# EAGLE board uMouse_prototype (EAGLE 8.5.0)
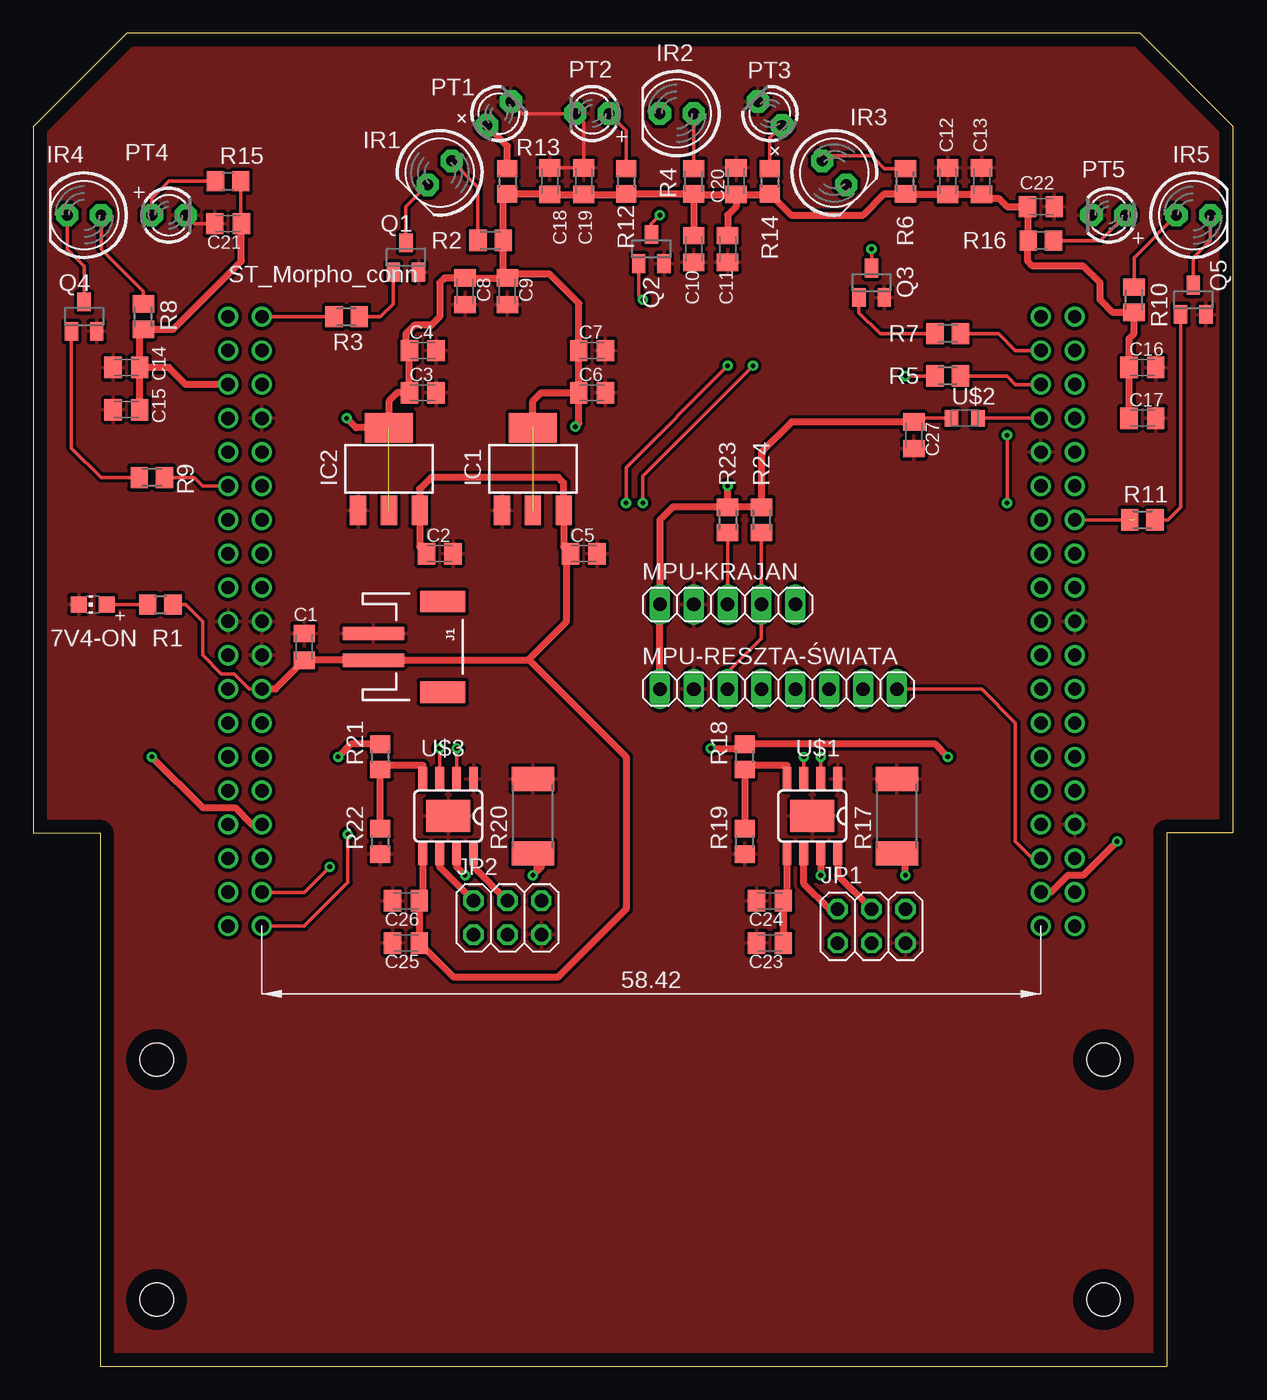
[diagram p0: board, top side]
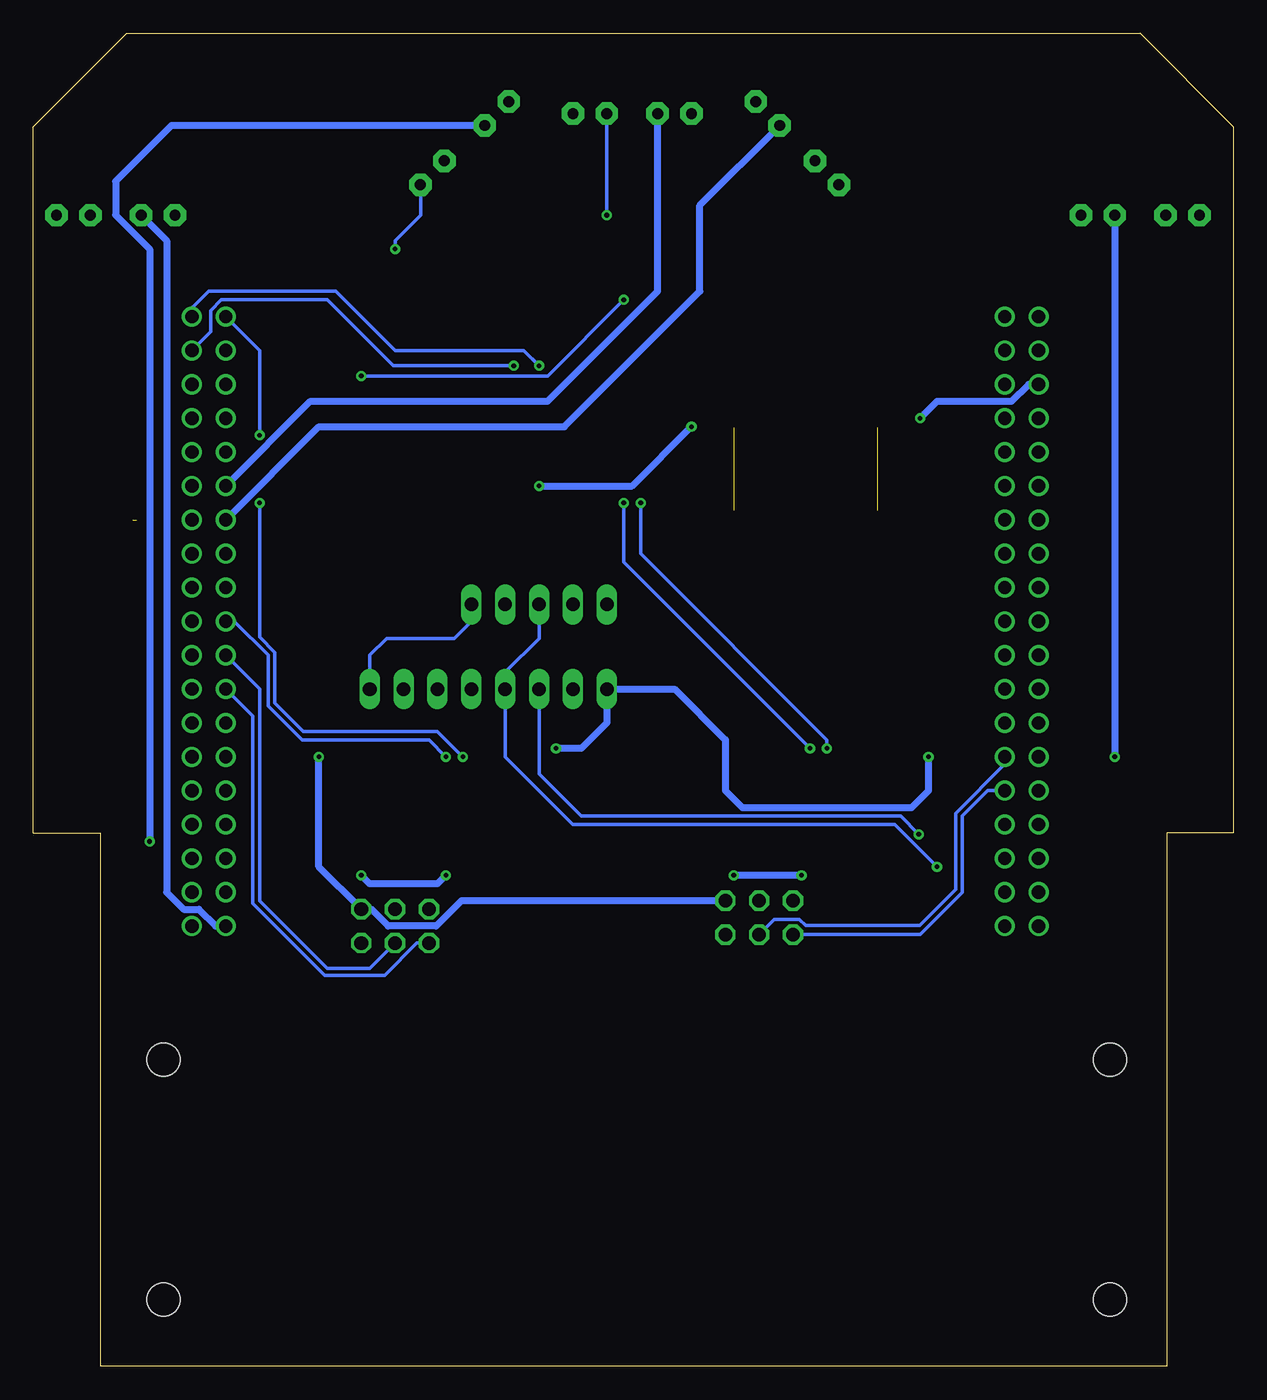
[diagram p1: board, bottom side, seen from below]

Size 90 x 100 mm. Coordinates in mm from the lower left corner, seen from the top.
Outline: 5,0 85,0 85,40 90,40 90,93 83,100 7,100 0,93 0,40 5,40 5,0
Copper layers (1*16): Top 0.035mm / dielectric 1.5mm / Bottom 0.035mm
Design rules "default *": minimum track width 5mil, minimum drill 0.15mm, track to track 6mil, track to pad 6mil, pad to pad 6mil, via to via 6mil, smd to smd 6mil, copper to edge 40mil, drill to drill 6mil, minimum pad ring 10mil, minimum via ring 8mil, stop-mask expansion 4mil, vias tented up to drill 0mil, thermal gap 10mil
Net classes: 0 default: width 0.305 mm, drill 0.508 mm, clearance 0.254 mm
Holes 2.5 mm at 9.25,5 9.25,23 80.25,23 80.25,5

## Footprints (pad centres in the part's own frame; a part is rotated, then mirrored left to right if it is on the bottom)
CHIP-LED0805 = smd 1.2 x 1.2: A 0,-1.05; C 0,1.05
C0805K = smd 1.3 x 1.6: 1 -1,0; 2 1,0
SOT223 = smd 1.219 x 2.235: 1 -2.311,-3.099; 2 0,-3.099; 3 2.311,-3.099 | smd 3.6 x 2.2: TAB 0,3.099
LED5MM = drill 0.813 pad 1.676 octagon: A -1.27,0; K 1.27,0
JST-2-SMD = smd 1 x 4.6: 1 -1,-3.7; 2 1,-3.7 | smd 1.6 x 3.4: NC1 -3.4,1.5; NC2 3.4,1.5
2X03 = drill 1.016 octagon: 1 -2.54,-1.27; 2 -2.54,1.27; 3 0,-1.27; 4 0,1.27; 5 2.54,-1.27; 6 2.54,1.27
1X05 = drill 1.016 long: 1 -5.08,0; 2 -2.54,0; 3 0,0; 4 2.54,0; 5 5.08,0
1X08 = drill 1.016 long: 1 -8.89,0; 2 -6.35,0; 3 -3.81,0; 4 -1.27,0; 5 1.27,0; 6 3.81,0; 7 6.35,0; 8 8.89,0
LED3MM = drill 0.813 pad 1.676 octagon: A -1.27,0; K 1.27,0
SOT23 = smd 1 x 1.4: 1 -0.95,-1.1; 2 0.95,-1.1; 3 0,1.1
R0805 = smd 1.3 x 1.5: 1 -0.95,0; 2 0.95,0
M0805 = smd 1.3 x 1.6: 1 -0.95,0; 2 0.95,0
R2512 = smd 1.8 x 3.2: 1 -2.8,0; 2 2.8,0
SOIC8TP = smd 1.75 x 0.65: 1 -2.8,1.905; 2 -2.8,0.635; 3 -2.8,-0.635; 4 -2.8,-1.905; 5 2.8,-1.905; 6 2.8,-0.635; 7 2.8,0.635; 8 2.8,1.905 | smd 2.41 x 3.3: PAD 0,0
RESC0805_L = smd 1 x 1.25: 1 -1,0; 2 1,0
MORPHO-4X19 = drill 1: 3V3_0 -27.94,25.4; 3V3_1 -27.94,30.48; 5V0_0 -27.94,22.86; 5V0_1 -27.94,38.1; AGND 33.02,5.08; AVDD 30.48,35.56; BOOT0 -30.48,35.56; GND_0 -30.48,20.32; GND_1 -27.94,17.78; GND_2 -27.94,20.32; GND_3 -27.94,35.56; GND_4 30.48,33.02; GND_5 33.02,20.32; NC_0 -27.94,12.7; NC_1 -27.94,33.02; PA0 -27.94,10.16; PA1 -27.94,7.62; PA2 30.48,0; PA3 30.48,-2.54; PA4 -27.94,5.08; PA5 30.48,30.48; PA6 30.48,27.94; PA7 30.48,25.4; PA8 30.48,15.24; PA9 30.48,17.78; PA10 30.48,2.54; PA11 33.02,27.94; PA12 33.02,30.48; PA13 -30.48,27.94; PA14 -30.48,25.4; PA15 -30.48,22.86; PB0 -27.94,2.54; PB1 33.02,15.24; PB2 33.02,17.78; PB3 30.48,5.08; PB4 30.48,10.16; PB5 30.48,7.62; PB6 30.48,22.86; PB7 -30.48,17.78; PB8 30.48,40.64; PB9 30.48,38.1; PB10 30.48,12.7; PB11 33.02,22.86; PB12 33.02,25.4; PB13 33.02,7.62; PB14 33.02,10.16; PB15 33.02,12.7; PC0 -27.94,-2.54; PC1 -27.94,0; PC2 -30.48,0; PC3 -30.48,-2.54; PC4 33.02,2.54; PC5 33.02,38.1; PC6 33.02,40.64; PC7 30.48,20.32; PC8 33.02,43.18; PC9 30.48,43.18; PC10 -30.48,43.18; PC11 -27.94,43.18; PC12 -30.48,40.64; PC13 -30.48,15.24; PC14 -30.48,12.7; PC15 -30.48,10.16; PD2 -27.94,40.64; PD8 33.02,33.02; PF0 -30.48,7.62; PF1 -30.48,5.08; PF4 33.02,-2.54; PF5 33.02,0; PF6 -30.48,33.02; PF7 -30.48,30.48; USB_5V 33.02,35.56; VBAT -30.48,2.54; VDD -30.48,38.1; VIN -27.94,15.24; ~RST -27.94,27.94

## Placement (x,y rotation side)
7V4-ON  [CHIP-LED0805]  4.45,57.15 90 top
C1  4.7uF 16V  [C0805K]  20.32,53.98 90 top
C2  1uF 16V  [C0805K]  30.48,60.96 0 top
C3  4.7uF 6.3V  [C0805K]  29.21,73.03 0 top
C4  100nF 6.3V  [C0805K]  29.21,76.2 0 top
C5  1uF 16V  [C0805K]  41.27,60.96 0 top
C6  4.7uF 6.3V  [C0805K]  41.91,73.03 0 top
C7  100nF 6.3V  [C0805K]  41.91,76.2 0 top
C8  100nF 6.3V  [C0805K]  32.38,80.64 270 top
C9  1uF 6.3V  [C0805K]  35.56,80.64 270 top
C10  100nF 6.3V  [C0805K]  49.53,83.82 270 top
C11  1uF 6.3V  [C0805K]  52.07,83.82 270 top
C12  100nF 6.3V  [C0805K]  68.58,88.9 90 top
C13  1uF 6.3V  [C0805K]  71.12,88.9 90 top
C14  100nF 6.3V  [C0805K]  6.99,74.93 180 top
C15  1uF 6.3V  [C0805K]  6.99,71.75 180 top
C16  100nF 6.3V  [C0805K]  83.19,74.93 0 top
C17  1uF 6.3V  [C0805K]  83.19,71.12 0 top
C18  1uF 6.3V  [C0805K]  38.73,88.9 90 top
C19  1uF 6.3V  [C0805K]  41.27,88.9 90 top
C20  1uF 6.3V  [C0805K]  52.7,88.9 90 top
C21  1uF 6.3V  [C0805K]  14.61,85.72 180 top
C22  1uF 6.3V  [C0805K]  75.56,87 0 top
C23  4.7uF  [C0805K]  55.24,31.75 180 top
C24  100nF  [C0805K]  55.24,34.92 180 top
C25  4.7uF  [C0805K]  27.94,31.75 180 top
C26  100nF  [C0805K]  27.94,34.92 180 top
C27  100nF 6.3V  [C0805K]  66.04,69.85 270 top
IC1  LM1117IMPX-5.0  [SOT223]  37.47,67.31 0 top
IC2  LM1117IMPX-5.0  [SOT223]  26.67,67.31 0 top
IR1  5mm IR  [LED5MM]  30.48,89.53 225 top
IR2  5mm IR  [LED5MM]  48.26,93.98 180 top
IR3  5mm IR  [LED5MM]  60.07,89.53 315 top
IR4  5mm IR  [LED5MM]  3.81,86.36 180 top
IR5  5mm IR  [LED5MM]  87,86.36 0 top
J1  [JST-2-SMD]  29.21,53.98 270 top
JP1  [2X03]  62.87,33.02 0 top
JP2  [2X03]  35.56,33.66 0 top
MPU-KRAJAN  [1X05]  52.07,57.15 0 top
MPU-RESZTA-ŚWIATA  [1X08]  55.88,50.8 0 top
PT1  [LED3MM]  34.92,93.98 45 top
PT2  [LED3MM]  41.91,93.98 180 top
PT3  [LED3MM]  55.24,93.98 135 top
PT4  [LED3MM]  10.16,86.36 0 top
PT5  [LED3MM]  80.64,86.36 180 top
Q1  [SOT23]  27.94,83.19 0 top
Q2  [SOT23]  46.35,83.82 0 top
Q3  [SOT23]  62.87,81.28 0 top
Q4  [SOT23]  3.81,78.74 0 top
Q5  [SOT23]  87,80.01 0 top
R1  1k  [R0805]  9.53,57.15 0 top
R2  10R  [M0805]  34.29,84.45 0 top
R3  1k  [M0805]  23.5,78.74 180 top
R4  10R  [M0805]  49.53,88.9 270 top
R5  1k  [M0805]  68.58,74.3 0 top
R6  10R  [M0805]  65.41,88.9 270 top
R7  1k  [M0805]  68.58,77.47 0 top
R8  10R  [M0805]  8.26,78.74 270 top
R9  1k  [M0805]  8.89,66.67 0 top
R10  10R  [M0805]  82.55,80.01 270 top
R11  1k  [M0805]  83.19,63.5 180 top
R12  [R0805]  44.45,88.9 270 top
R13  [R0805]  35.56,88.9 270 top
R14  [R0805]  55.24,88.9 270 top
R15  [R0805]  14.61,88.9 0 top
R16  [R0805]  75.56,84.45 180 top
R17  [R2512]  64.77,41.27 90 top
R18  [R0805]  53.34,45.72 90 top
R19  [R0805]  53.34,39.37 90 top
R20  [R2512]  37.47,41.27 90 top
R21  [R0805]  26.04,45.72 90 top
R22  [R0805]  26.04,39.37 90 top
R23  1k  [M0805]  52.07,63.5 90 top
R24  1k  [M0805]  54.61,63.5 90 top
U$1  A4950-TOMEK  [SOIC8TP]  58.42,41.27 270 top
U$2  [RESC0805_L]  69.85,71.12 0 top
U$3  A4950-TOMEK  [SOIC8TP]  31.11,41.27 270 top
U$5  ST_MORPHO_STM32_F446RE  [MORPHO-4X19]  45.09,35.56 0 top

## Library data of the parts
7V4-ON IR1-IR5 PT1-PT5 Q1-Q5 = adafruit
C1-C27 R2-R24 = rcl
IC1 IC2 = lm1117
J1 = SparkFun-Connectors; PROD_ID: CONN-11443; SF_ID: PRT-08612
JP1 JP2 MPU-KRAJAN MPU-RESZTA-ŚWIATA = pinhead
R1 = resistor
U$1 U$3 = allegro_a4950
U$2 = Nordic_nRF
U$5 = st-morpho

## Nets
7.4V/VBAT: C1.1 C2.1 C5.1 C25.1 C26.1 IC1.3 IC2.3 J1.2 R1.2 U$3.5 U$5.VIN
GND: 7V4-ON.C C1.2 C2.2 C3.2 C4.2 C5.2 C6.2 C7.2 C8.2 C9.2 C10.2 C11.2 C12.2 C13.2 C14.2 C15.2 C16.2 C17.2 C18.2 C19.2 C20.2 C21.2 C22.2 C23.2 C24.2 C25.2 C26.2 C27.2 IC1.1 IC2.1 J1.1 JP1.5 JP2.5 MPU-KRAJAN.2 MPU-RESZTA-ŚWIATA.2 PT1.K PT2.K PT3.K PT4.K PT5.K Q1.2 Q2.2 Q3.2 Q4.2 Q5.2 R17.2 R19.1 R20.2 R22.1 U$1.1 U$1.PAD U$3.1 U$3.PAD U$5.AGND U$5.GND_0 U$5.GND_1 U$5.GND_2 U$5.GND_3 U$5.GND_4 U$5.GND_5
INT: MPU-KRAJAN.5 MPU-RESZTA-ŚWIATA.8 U$5.PA10
IR1_SIGNAL: R3.2 U$5.PC11
IR2_SIGNAL: R5.2 U$5.PB9
IR3: IR3.K Q3.3
IR3_SIGNAL: R7.2 U$5.PB8
IR4_SIGNAL: R9.2 U$5.PF7
IR5_SIGNAL: R11.2 U$5.PA11
LEFT-ENC-A: JP2.3 U$5.PA0
LEFT-ENC-B: JP2.1 U$5.PA1
LEFT-M-OUT1: JP2.2 U$3.6
LEFT-M-OUT2: JP2.4 U$3.8
LEFT-M-PWM1: U$3.3 U$5.PC8
LEFT-M-PWM2: U$3.2 U$5.PC6
N$1: 7V4-ON.A R1.1
N$2: Q1.1 R3.1
N$3: IR1.A R2.1
N$4: IR1.K Q1.3
N$5: Q2.1 R5.1
N$6: IR2.A R4.1
N$7: IR2.K Q2.3
N$8: Q3.1 R7.1
N$9: IR3.A R6.1
N$11: Q4.1 R9.1
N$12: IR4.A R8.1
N$13: IR4.K Q4.3
N$14: Q5.1 R11.1
N$15: IR5.A R10.1
N$16: IR5.K Q5.3
N$17: R17.1 U$1.7
N$18: R18.1 R19.2 U$1.4
N$19: R20.1 U$3.7
N$20: R21.1 R22.2 U$3.4
N$22: U$2.2 U$5.AVDD
RECEIVER_1: PT1.A R13.1 U$5.PA6
RECEIVER_2: PT2.A R12.1 U$5.PA5
RECEIVER_3: PT3.A R14.1 U$5.PA2
RECEIVER_4: PT4.A R15.1 U$5.PA4
RECEIVER_5: PT5.A R16.1 U$5.PA3
RIGHT-ENC-A: JP1.3 U$5.PA9
RIGHT-ENC-B: JP1.1 U$5.PA8
RIGHT-M-OUT1: JP1.2 U$1.6
RIGHT-M-OUT2: JP1.4 U$1.8
RIGHT-M-PWM1: U$1.3 U$5.PC9
RIGHT-M-PWM2: U$1.2 U$5.PC7
SCL: MPU-KRAJAN.4 MPU-RESZTA-ŚWIATA.3 R24.1 U$5.PC0
SDA: MPU-KRAJAN.3 MPU-RESZTA-ŚWIATA.4 R23.1 U$5.PC1
VBAT: C23.1 C24.1 U$1.5
VCC: C3.1 C4.1 C6.1 C7.1 C8.1 C9.1 C10.1 C11.1 C12.1 C13.1 C14.1 C15.1 C16.1 C17.1 C18.1 C19.1 C20.1 C21.1 C22.1 C27.1 IC1.2 IC1.TAB IC2.2 IC2.TAB JP1.6 JP2.6 MPU-KRAJAN.1 MPU-RESZTA-ŚWIATA.1 R2.2 R4.2 R6.2 R8.2 R10.2 R12.2 R13.2 R14.2 R15.2 R16.2 R18.2 R21.2 R23.2 R24.2 U$2.1 U$5.VDD

## Tracks (layer width: path | path; a pad name or v marks a point on that pad's centre or on a via)
7.4V/VBAT
  Top 0.254: U$5.VIN 16.21,50.8 15.07,51.94 14.11,51.94 12.7,53.34 12.7,55.88 11.43,57.15 R1.2
  Top 0.508: U$5.VIN 18.14,50.8 C1.1 J1.2 37.1,52.98 37.15,53.02 | 37.15,53.02 40.01,55.88 40.01,60.69 C5.1 39.78,61.46 IC1.3 39.78,66.27 39.37,66.67 29.84,66.67 28.98,65.81 IC2.3 28.98,61.46 C2.1 | U$3.5 29.21,35.2 C26.1 C25.1 31.48,29.21 39.37,29.21 44.45,34.29 44.45,45.72 37.15,53.02
GND
  Top 0.254: C21.2 12.06,85.72 PT4.K | C18.2 C19.2 41.27,93.34 PT2.K 36.72,93.98 PT1.K
  pour Top: 0,93.98 7.62,101.6 82.55,101.6 91.44,92.71 91.44,39.37 86.36,39.37 86.36,-1.27 3.81,-1.27 3.81,39.37 -1.27,39.37 -1.27,92.71
INT
  Top 0.254: MPU-RESZTA-ŚWIATA.8 71.12,50.8 73.66,48.26 73.66,39.37 74.93,38.1 U$5.PA10
  Bottom 0.254: MPU-RESZTA-ŚWIATA.8 64.77,53.34 63.5,54.61 58.42,54.61 57.15,55.88 MPU-KRAJAN.5
IR1_SIGNAL
  Top 0.254: U$5.PC11 R3.2
IR2_SIGNAL
  Top 0.254: U$5.PB9 73.66,73.66 73.03,74.3 R5.2
IR3  (via drill 0.35)
  Top 0.254: Q3.3 v62.87,83.82
  Bottom 0.254: v62.87,83.82 62.87,84.45 60.96,86.36 60.96,88.63 IR3.K | IR3.K | IR3.K
IR3_SIGNAL
  Top 0.254: U$5.PB8 73.66,76.2 72.39,77.47 R7.2
IR4_SIGNAL
  Top 0.254: U$5.PF7 12.7,66.04 12.06,66.67 R9.2
IR5_SIGNAL  (1 unrouted)
  Top 0.254: U$5.PA11 82.55,63.5
LEFT-ENC-A
  Bottom 0.254: JP2.3 34.42,33.53 32.55,33.53 32.08,33.06 23.54,33.06 20.83,35.77 20.83,41.48 17.14,45.17 U$5.PA0
LEFT-ENC-B
  Bottom 0.254: JP2.1 23.5,32.38 20.32,35.56 20.32,41.27 18.41,43.18 U$5.PA1
LEFT-M-OUT1
  Top 0.508: JP2.2 30.48,37.47 U$3.6
LEFT-M-OUT2
  Top 0.508: JP2.4 33.02,37.47 U$3.8
LEFT-M-PWM1  (via drill 0.35)
  Top 0.254: v52.07,75.05 44.45,67.43 v44.45,64.77 | v30.48,46.35 U$3.3
  Bottom 0.254: U$5.PC8 78.11,79.38 76.83,80.64 67.31,80.64 62.87,76.2 53.22,76.2 v52.07,75.05 52.58,75.56 | v44.45,64.77 44.45,60.96 30.48,46.99 v30.48,46.35
LEFT-M-PWM2  (via drill 0.35)
  Top 0.254: U$3.2 v31.75,46.35 | v45.72,64.77 45.72,66.8 v53.98,75.05
  Bottom 0.254: v31.75,46.35 45.72,60.33 v45.72,64.77 | v53.98,75.05 62.99,75.05 67.94,80.01 75.9,80.01 76.7,79.21 76.7,77.61 U$5.PC6
N$1
  Top 0.254: R1.1 7V4-ON.A
N$2
  Top 0.254: Q1.1 26.99,79.69 26.04,78.74 R3.1
N$3
  Top 0.254: IR1.A 33.34,88.47 R2.1
N$4
  Top 0.254: IR1.K 27.94,87 Q1.3
N$5  (via drill 0.35)
  Top 0.254: Q2.1 45.41,80.33 v45.72,80.01 | v65.41,74.3 R5.1
  Bottom 0.254: v45.72,80.01 51.44,74.3 v65.41,74.3
N$6
  Top 0.254: R4.1 IR2.A
N$7  (via drill 0.35)
  Top 0.254: Q2.3 46.35,85.72 v46.99,86.36
  Bottom 0.254: v46.99,86.36 IR2.K
N$8
  Top 0.254: R7.1 63.5,77.47 61.91,79.06 Q3.1
N$9
  Top 0.254: R6.1 63.82,89.85 62.87,90.81 59.55,90.81 IR3.A
N$11
  Top 0.254: R9.1 5.08,66.67 2.86,68.89 Q4.1
N$12
  Top 0.254: R8.1 8.26,80.64 5.08,83.82 IR4.A
N$13
  Top 0.254: IR4.K 2.54,83.82 3.81,82.55 Q4.3
N$14
  Top 0.254: Q5.1 86.05,64.45 85.09,63.5 R11.1
N$15
  Top 0.254: IR5.A 82.55,83.19 R10.1
N$16
  Top 0.254: Q5.3 87,83.19 88.27,84.45 IR5.K
N$17  (via drill 0.35)
  Top 0.508: U$1.7 v59.05,36.83 | v65.41,36.83 65.41,38.73 65.14,38.48 R17.1
  Bottom 0.508: v59.05,36.83 59.69,36.2 64.77,36.2 v65.41,36.83
N$18
  Top 0.508: R19.2 R18.1 53.66,45.09 56.52,45.09 U$1.4
N$19  (via drill 0.35)
  Top 0.508: U$3.7 31.75,37.47 v32.38,36.83 | v37.47,36.83 37.78,37.15 | 37.78,37.15 38.1,37.47 38.1,38.1 | 37.78,37.15 37.78,37.78 38.1,38.1 | R20.1 37.73,38.48 38.1,38.1
  Bottom 0.508: v32.38,36.83 v37.47,36.83
N$20
  Top 0.508: R22.2 R21.1 26.35,45.09 29.21,45.09 U$3.4
N$22
  Top 0.254: U$5.AVDD U$2.2
RECEIVER_1
  Top 0.508: PT1.A 35.56,91.55 R13.1
  Bottom 0.508: U$5.PA6 68.58,70.48 50.16,70.48 40.01,80.64 40.01,87.1 PT1.A
RECEIVER_2
  Top 0.254: R12.1 44.45,92.71 PT2.A
  Bottom 0.508: U$5.PA5 69.22,72.39 51.44,72.39 43.18,80.64 PT2.A
RECEIVER_3  (via drill 0.35)
  Top 0.254: R14.1 55.24,92.18 PT3.A
  Top 0.508: v81.28,39.37 78.73,36.82 77.58,36.82 76.32,35.56 U$5.PA2
  Bottom 0.508: PT3.A 79.64,93.08 83.82,88.9 83.82,86.36 81.28,83.82 v81.28,39.37
RECEIVER_4  (via drill 0.35)
  Top 0.254: PT4.A 8.89,87.63 10.16,88.9 R15.1
  Top 0.508: v8.89,45.72 12.71,41.9 15.13,41.9 16.39,40.64 U$5.PA4
  Bottom 0.508: PT4.A v8.89,45.72
RECEIVER_5
  Top 0.254: PT5.A 80.01,84.45 R16.1
  Bottom 0.508: PT5.A 80.01,84.45 80.01,35.56 78.73,34.28 77.58,34.28 76.32,33.02 U$5.PA3
RIGHT-ENC-A
  Bottom 0.254: U$5.PA9 73.03,50.8 73.03,34.92 67.94,29.84 64.77,29.84 JP1.3
RIGHT-ENC-B
  Bottom 0.254: U$5.PA8 73.53,48.77 73.53,34.72 68.16,29.34 63.66,29.34 61.25,31.75 JP1.1
RIGHT-M-OUT1
  Top 0.508: JP1.2 59.69,34.29 57.78,36.2 U$1.6
RIGHT-M-OUT2
  Top 0.508: JP1.4 60.33,36.83 U$1.8
RIGHT-M-PWM1  (via drill 0.35)
  Top 0.254: U$1.3 v57.78,45.72 | v73.03,64.77 v73.03,69.85
  Bottom 0.254: v57.78,45.72 59.69,47.62 69.77,47.62 71.88,49.74 71.88,53.55 73.03,54.69 v73.03,64.77 | v73.03,69.85 73.03,76.2 U$5.PC9
RIGHT-M-PWM2  (via drill 0.35)
  Top 0.254: U$1.2 v59.05,45.72
  Bottom 0.254: v59.05,45.72 60.33,46.99 69.85,46.99 72.39,49.53 72.39,53.34 74.93,55.88 U$5.PC7
SCL  (via drill 0.35)
  Top 0.254: MPU-RESZTA-ŚWIATA.3 52.07,52.07 54.61,54.61 MPU-KRAJAN.4 R24.1 | U$5.PC0 20.32,33.02 23.59,36.29 v23.59,39.91
  Bottom 0.254: v23.59,39.91 24.96,41.27 48.9,41.27 52.07,44.45 MPU-RESZTA-ŚWIATA.3
SDA  (via drill 0.35)
  Top 0.254: R23.1 MPU-KRAJAN.3 | U$5.PC1 20.32,35.56 v22.23,37.47
  Bottom 0.254: MPU-KRAJAN.3 52.07,54.61 54.61,52.07 MPU-RESZTA-ŚWIATA.4 54.61,45.72 49.53,40.64 25.4,40.64 v22.23,37.47
VBAT
  Top 0.508: U$1.5 56.52,35.2 C24.1 C23.1
VCC  (via drill 0.35)  (2 unrouted)
  Top 0.254: R15.2 15.55,85.78 C21.1 | U$2.1 66.31,71.12 66.17,70.98
  Top 0.508: U$5.VDD 11.43,73.66 10.16,74.93 C14.1 | C15.1 C14.1 | C14.1 7.99,77.52 R8.2 10.48,77.79 15.61,82.92 C21.1 | C9.1 C8.1 30.84,81.64 30.48,81.28 30.48,78.74 29.84,78.11 28.57,78.11 27.94,77.47 27.94,76.47 C4.1 C3.1 27.3,73.03 26.67,72.39 IC2.TAB 24.21,70.41 v23.5,71.12 | C9.1 35.24,81.97 R2.2 35.24,87.63 R13.2 38.69,87.95 C18.1 C19.1 44.4,87.9 R12.2 R4.2 49.58,87.9 | 49.58,87.9 C20.1 | C20.1 52.7,87 52.07,86.36 C11.1 | C10.1 49.58,84.87 49.58,87.9 | C20.1 55.2,87.9 R14.2 56.84,86.36 62.23,86.36 63.82,87.95 R6.2 65.45,87.9 C12.1 C13.1 71.39,87.63 72.39,87.63 73.03,87 C22.1 74.56,84.5 | 74.56,84.5 R16.2 | IC1.TAB 37.47,72.39 38.1,73.03 C6.1 | C6.1 C7.1 40.91,79.74 38.73,81.92 35.83,81.92 C9.1 | C17.1 C16.1 82.19,77.11 82.55,77.47 R10.2 80.96,79.06 80.01,80.01 80.01,81.28 78.74,82.55 74.93,82.55 74.56,82.92 74.56,84.5 | R23.2 R24.2 54.61,68.58 56.88,70.85 C27.1 66.17,70.98 | R23.2 47.94,64.45 46.99,63.5 MPU-KRAJAN.1 MPU-RESZTA-ŚWIATA.1 | R23.2 v52.07,66.04 | v40.64,70.48 40.91,70.75 C6.1 | v50.8,46.35 53.34,46.35 R18.2 67.63,46.67 v68.58,45.72 | R21.2 23.81,46.67 v22.86,45.72
  Bottom 0.508: U$5.VDD 15.36,73.66 16.62,72.4 22.22,72.4 v23.5,71.12 | JP2.6 57.89,34.92 59.8,33.02 63.39,33.02 64.66,34.29 JP1.6 68.58,37.47 v68.58,45.72 | v52.07,66.04 45.09,66.04 v40.64,70.48 | v50.8,46.35 48.9,46.35 46.99,48.26 MPU-RESZTA-ŚWIATA.1 41.91,50.8 38.1,46.99 38.1,43.18 36.83,41.91 24.13,41.91 22.86,43.18 v22.86,45.72